# Altium PCB MAX7219_8X8LED_BOARD.PcbDoc
Units mm, origin at the board's own origin, x right, y up, seen from the top; angles counter-clockwise.
Board outline 50 x 50 mm, 2 copper layers (Top Layer, Bottom Layer), stack 1.621 mm thick; 4 components, 23 nets, 60 pads, 26 vias.
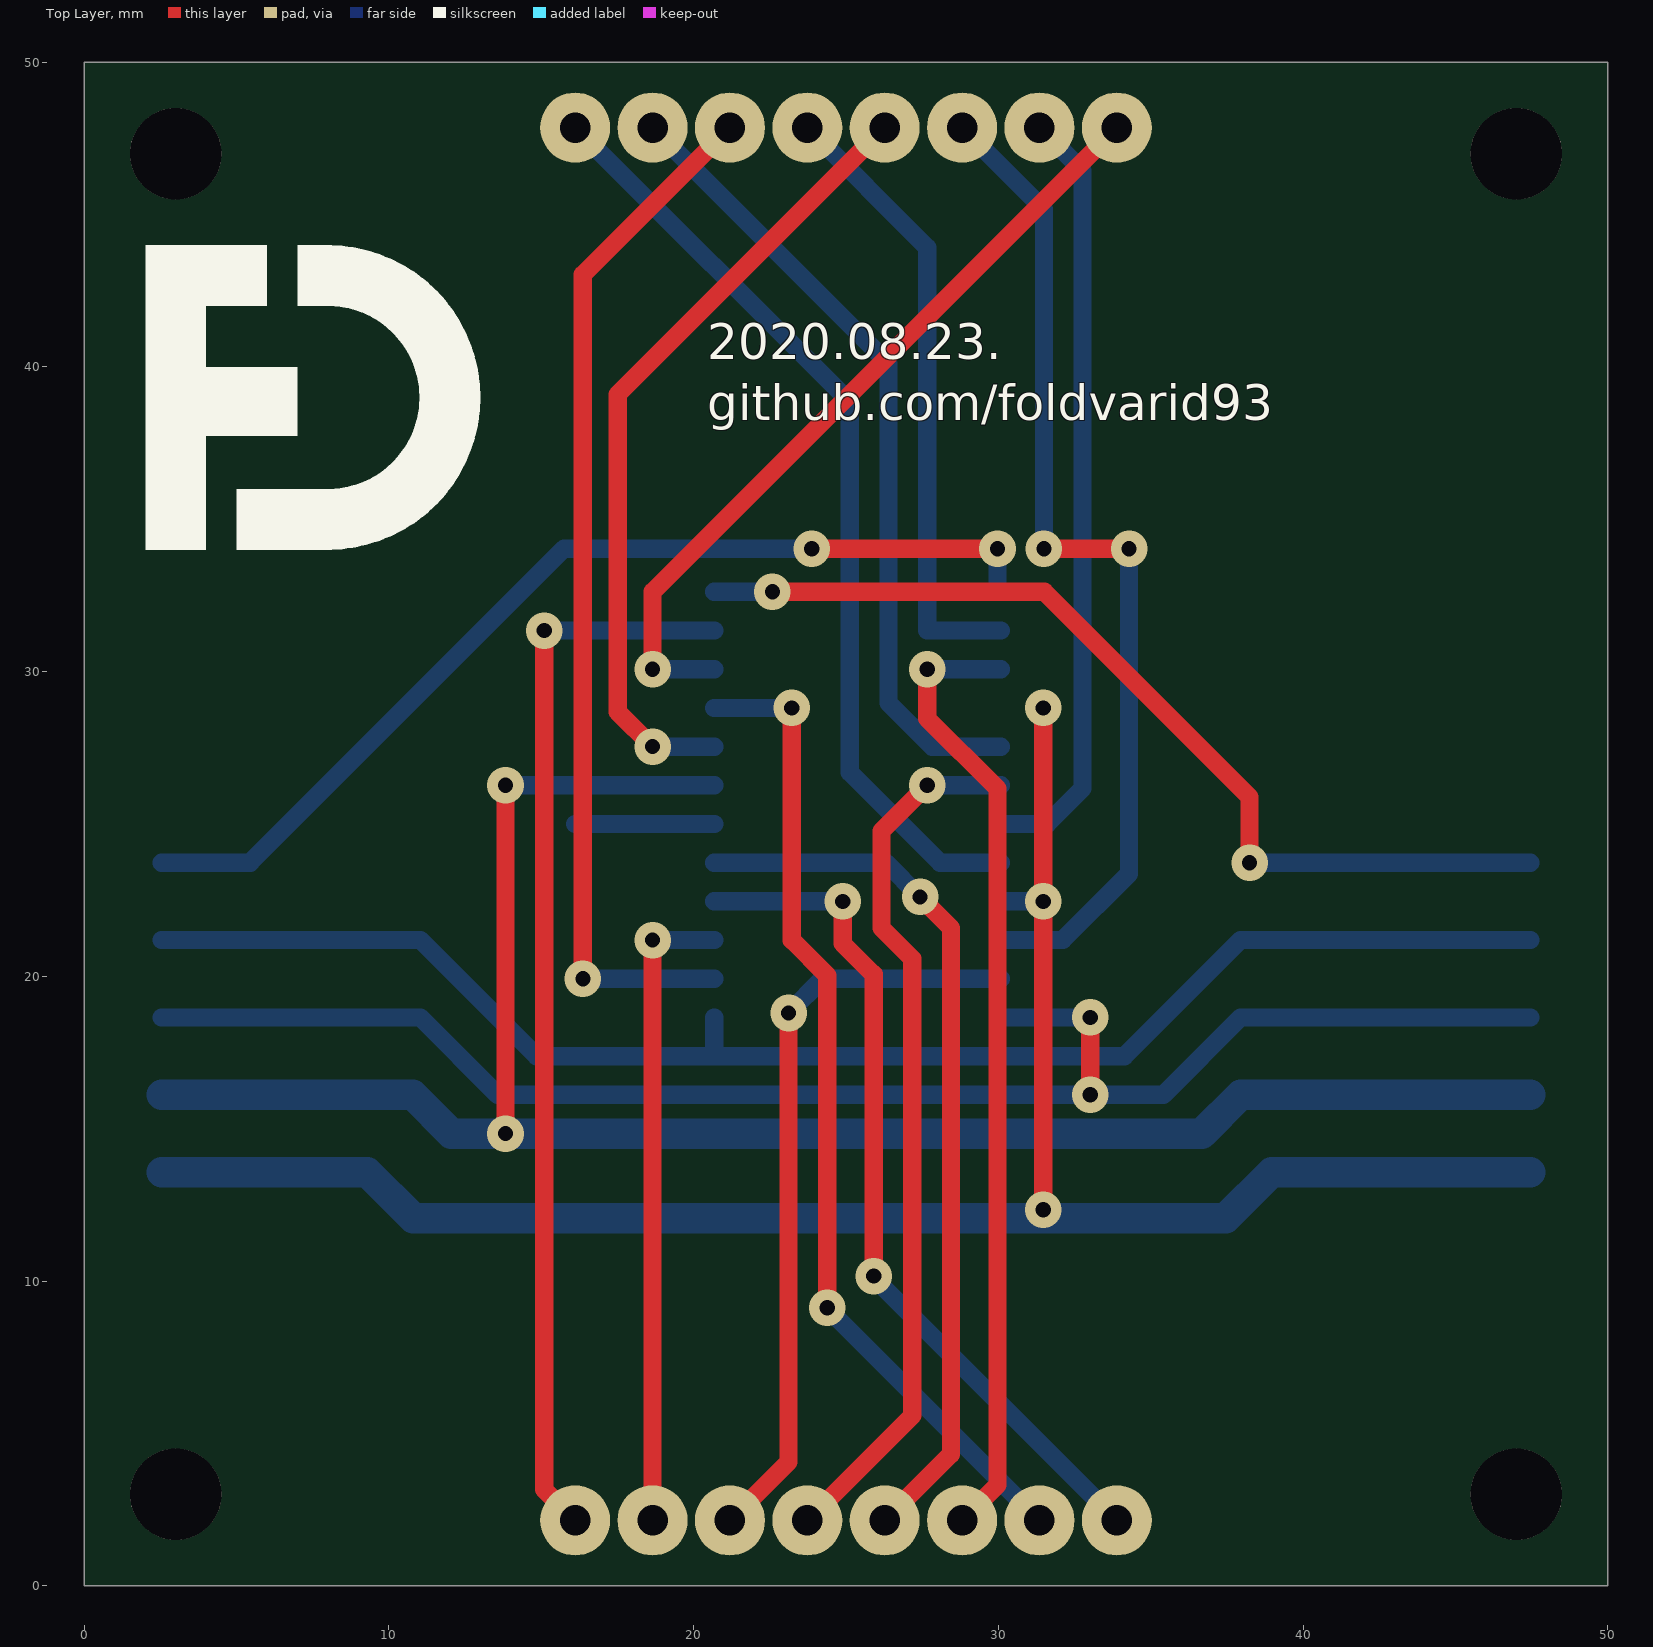
[diagram p0: Top Layer view]
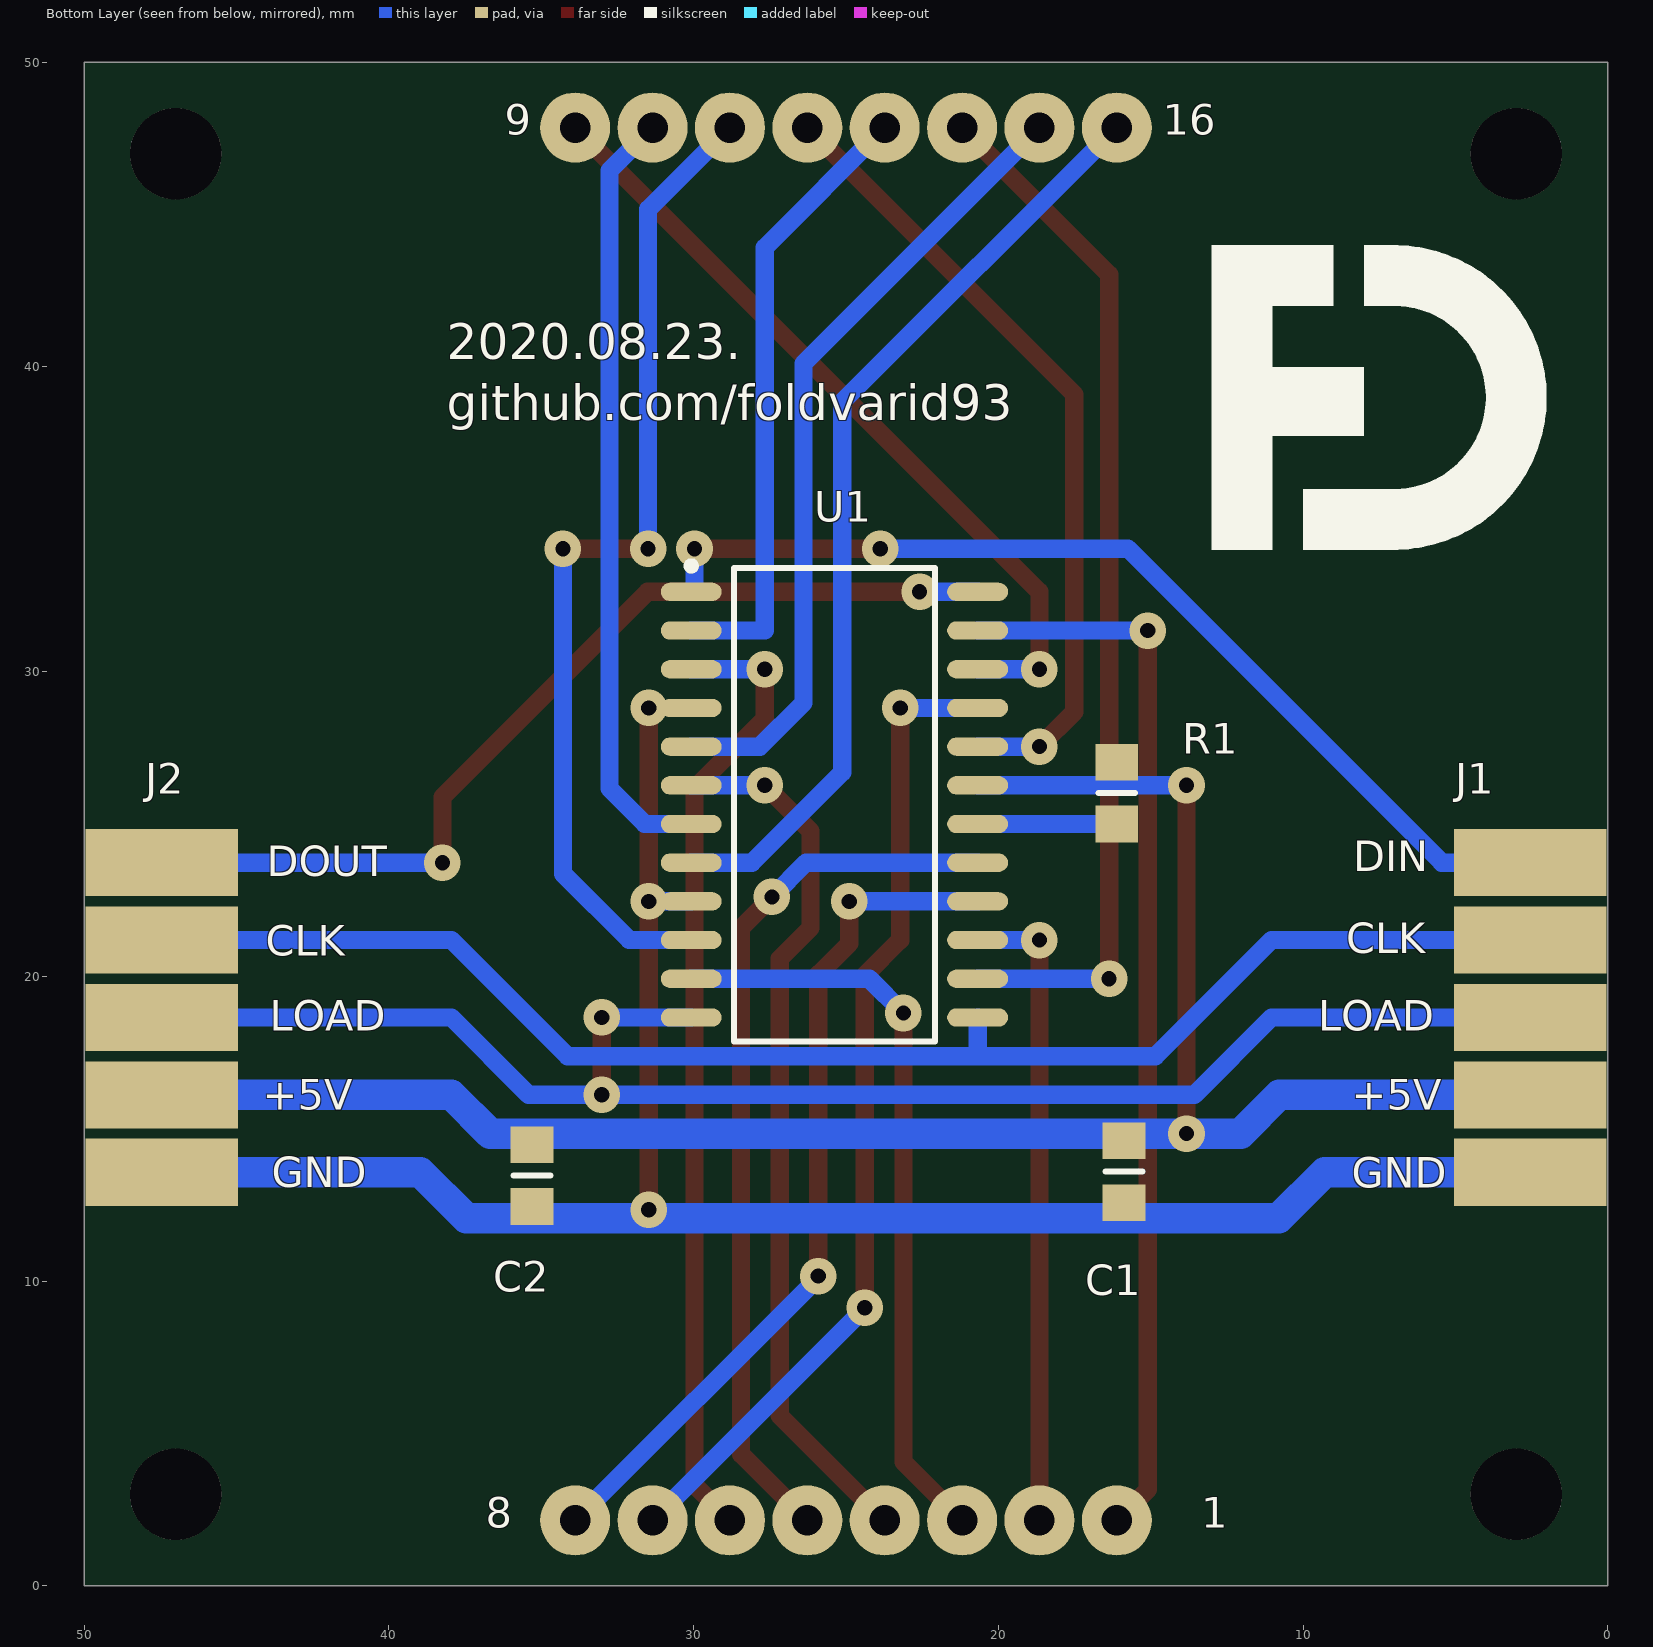
[diagram p1: Bottom Layer view, seen from below]
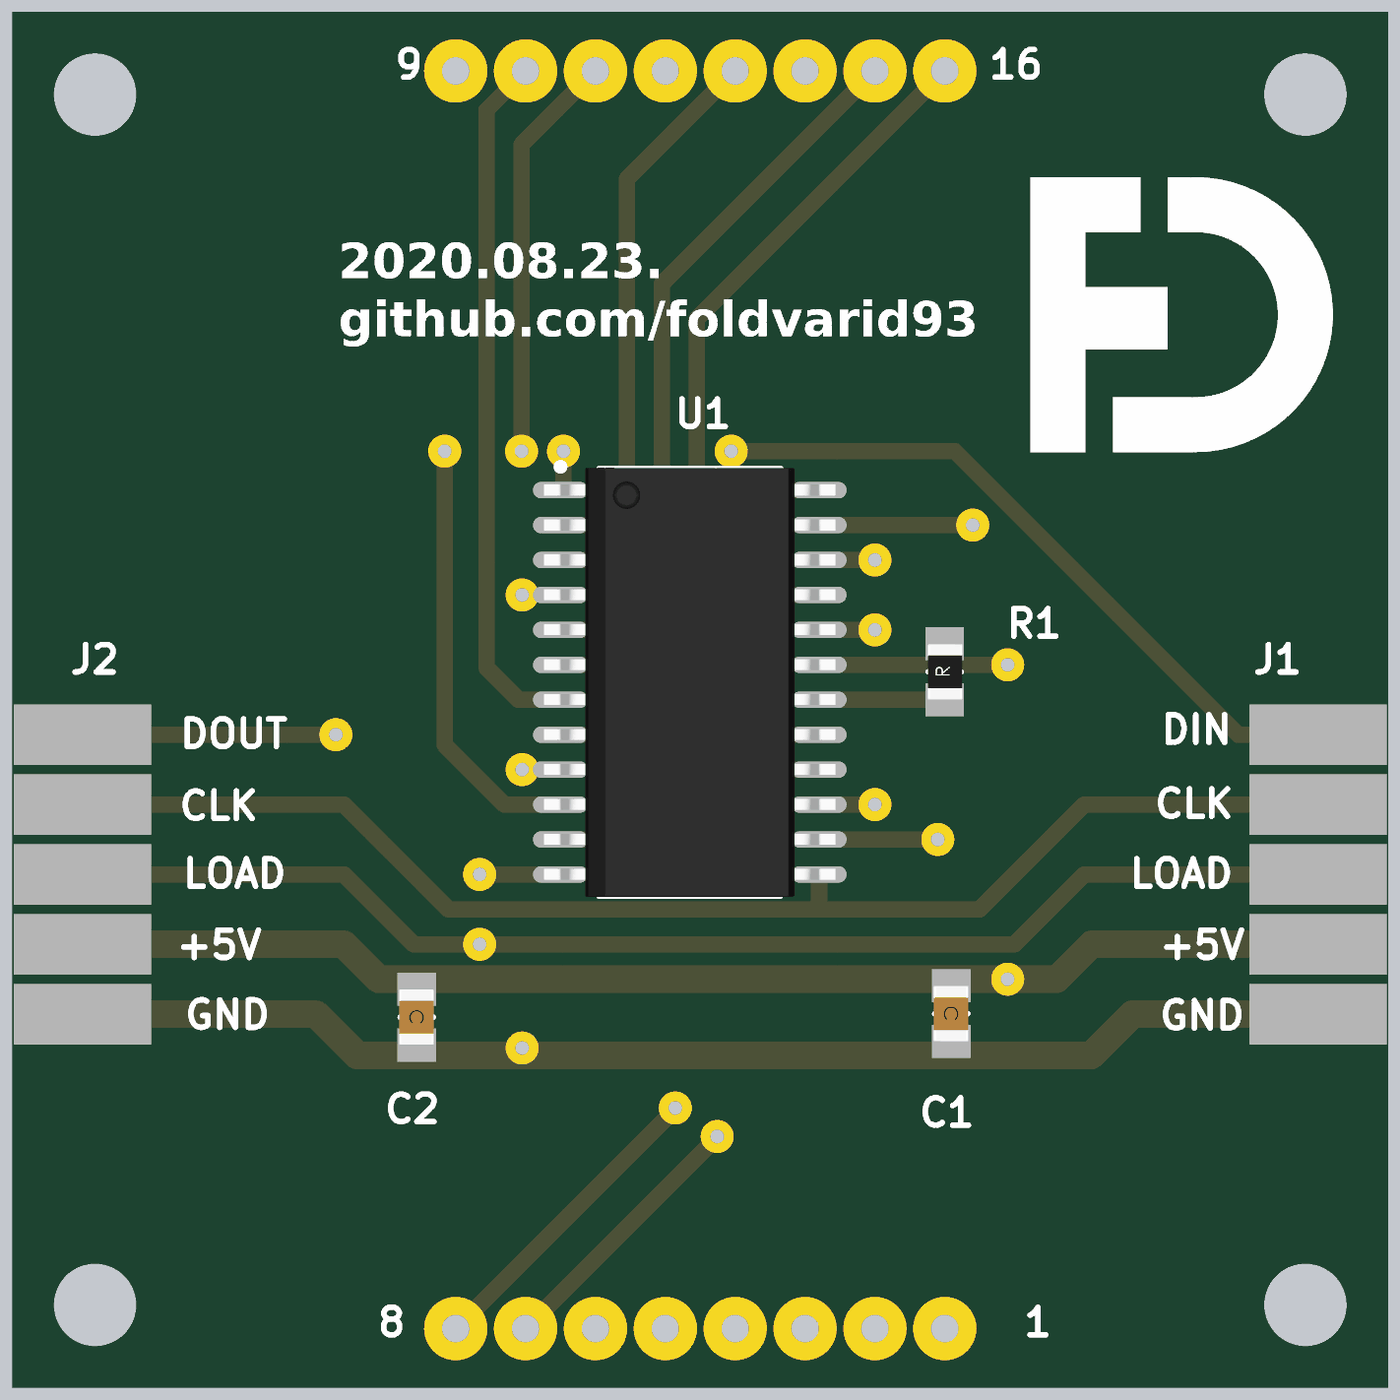
[diagram p2: 3D render of the assembled board from below, using the file's embedded part models]

## Layer stack, top to bottom
Top Solder: solder mask 0.0102, Solder Resist, Dk 3.5
Top Layer: signal copper 0.0356
Dielectric1: core 1.55, FR-4, Dk 4.8
Bottom Layer: signal copper 0.0356
Bottom Solder: solder mask 0.0102, Solder Resist, Dk 3.5

## Board outline
0,0 50,0 50,50 0,50

## Design rules (kind name [scope] priority, off if disabled: settings)
AssemblyTestPointUsage [All] p1 off:
AssemblyTestpoint [All] p1 off: testpointundercomponent=TRUE minsize=1.016 maxsize=2.54 preferedsize=1.524 minholesize=0 maxholesize=1.016 preferedholesize=0.813 testpointgrid=0.025 usegrid=TRUE gridtolerance=0 allowsidetop=TRUE allowsidebottom=TRUE
Clearance Top_GND_Polly [InPolygon and InNet('GND_12V')] p1: gap=0.25 ignorepadtopadclearanceinfootprint=FALSE except(0: Arc-Hole Track-Hole SMDPad-Hole THPad-Hole Via-Hole Fill-Hole Poly-Hole Region-Hole Text-Hole)
Clearance [All] p2: gap=0.2 ignorepadtopadclearanceinfootprint=FALSE except(0: Arc-Hole Track-Hole SMDPad-Hole THPad-Hole Via-Hole Fill-Hole Poly-Hole Region-Hole Text-Hole)
ComponentClearance [All] p1 off: gap=0.254 collisioncheckmode=3 verticalgap=0.254 showdistances=FALSE
FabricationTestPointUsage [All] p1 off: valid=0 allowmultiple=FALSE
FabricationTestpoint [All] p1 off: side=3 testpointundercomponent=TRUE minsize=1.016 maxsize=2.54 preferedsize=1.524 minholesize=0 maxholesize=1.016 preferedholesize=0.813 testpointgrid=0.025 allowsidetop=TRUE allowsidebottom=TRUE usegrid=TRUE gridtolerance=0
Height [All] p1 off: minheight=0 maxheight=25.4 prefheight=12.7
HoleSize [All] p1: absolutevalues=TRUE maxlimit=5 minlimit=0.25 maxpercent=80.000 minpercent=20.000
HoleToHoleClearance [All] p1: gap=0.25 allowstackedmicrovias=TRUE
MinimumAnnularRing PadOutsideLayers_large [IsPad AND (PadIsPlated = 'True') AND (AsMM(HoleSize) > 0.45)] p1: minimumring=0.25
MinimumAnnularRing PadOutsideLayers_small [IsPad AND (PadIsPlated = 'True') AND (AsMM(HoleSize) <= 0.45)] p2: minimumring=0.225
MinimumAnnularRing ViaOutsideLayers_large [IsVia AND (AsMM(HoleSize) > 0.45)] p3: minimumring=0.25
MinimumAnnularRing ViaOutsideLayers_small [IsVia AND (AsMM(HoleSize) <= 0.45)] p4: minimumring=0.225
MinimumSolderMaskSliver [All] p1: minsoldermaskwidth=0.25
PlaneClearance [All] p1: clearance=0.5
PlaneConnect [All] p1: planeconnectstyle=Relief reliefexpansion=0.5 reliefentries=4 reliefconductorwidth=0.25 reliefairgap=0.25
PolygonConnect [All] p1: connectstyle=Relief reliefconductorwidth=0.25 reliefentries=4 polygonreliefangle="90 Angle" airgapwidth=0.254
RoutingCorners [All] p1: cornerstyle=45-Degree minsetback=2 maxsetback=2
RoutingVias [All] p1: holewidth=0.3 width=0.75 viastyle="Through Hole" minholewidth=0.25 minwidth=0.65 maxholewidth=1 maxwidth=3
SilkToSilkClearance [All] p1: silktosilkclearance=0.15
SilkToSolderMaskClearance SilkscreenOverComponentPads [IsPad] p1: minsilkscreentomaskgap=0.2 clearancetoexposedcopper=TRUE
SolderMaskExpansion [All] p1: expansion=0
Width [All] p1: maxlimit=10 minlimit=0.15 preferedwidth=0.3
16 further rules are at their usual default settings.

## Components (designator, comment, footprint, x,y, rotation, side; value= is the part's Value field where it differs from the comment)
C1 "100n" "CAP 0805" 15.875,14.605 r270 bottom
C2 "100n" "CAP 0805" 35.306,14.478 r270 bottom
R1 "10k" "RES 0805" 16.11,25 r90 bottom
U1 "MAX7219" SO24 30.08,32.62 r180 bottom

## Footprints (in the part's own frame and the unit in brackets; to place one, negate y for a bottom-side part, rotate by r counter-clockwise, add the part's x,y. Pads: shape width x height; smd on the part's side, far side on the other; paste and mask are expansions set on the pad)
"CAP 0805" [mm] "0805 CAPACITOR"
  rect 1.2x1.4 smd: 1(0,0) 2(2.032,0)
  silkscreen extent 1.02,-0.6 1.02,0.6, body extent 0.02,-0.63 2.02,0.62, height 0.6
"RES 0805" [mm] "0805 Resistor"
  rect 1.2x1.4 smd: 1(0,0) 2(2.032,0)
  silkscreen extent 1.02,-0.6 1.02,0.6, body extent 0.02,-0.63 2.02,0.62, height 0.6
SO24 [mm]
  oval 2x0.6 smd: 1(0,0) 2(0,-1.27) 3(0,-2.54) 4(0,-3.81) 5(0,-5.08) 6(0,-6.35) 7(0,-7.62) 8(0,-8.89) 9(0,-10.16) 10(0,-11.43) 11(0,-12.7) 12(0,-13.97) 13(9.4,-13.97) 14(9.4,-12.7) 15(9.4,-11.43) 16(9.4,-10.16) 17(9.4,-8.89) 18(9.4,-7.62) 19(9.4,-6.35) 20(9.4,-5.08) 21(9.4,-3.81) 22(9.4,-2.54) 23(9.4,-1.27) 24(9.4,0)
  silkscreen extent -0.13,-14.76 8,0.97, body extent -0.6,-14.78 10,0.82, height 2.58

## Part data
C1 C2: library part CAP, "NON POLARIZED CAPACITOR"
R1: library part RES, "RESISTOR"
U1: "8X8 LED DRIVER IC"

## Free pads (board coordinates)
  rect 5x2.2 smd far side: 1(2.54,23.73) 1(47.46,13.57) 2(2.54,21.19) 2(47.46,16.11) 3(2.54,18.65) 3(47.46,18.65) 4(2.54,16.11) 4(47.46,21.19) 5(2.54,13.57) 5(47.46,23.73)
  round 2.3 hole 1: 1(16.11,2.14) 2(18.65,2.14) 3(21.19,2.14) 4(23.73,2.14) 5(26.27,2.14) 6(28.81,2.14) 7(31.35,2.14) 8(33.89,2.14) 9(33.89,47.86) 10(31.35,47.86) 11(28.81,47.86) 12(26.27,47.86) 13(23.73,47.86) 14(21.19,47.86) 15(18.65,47.86) 16(16.11,47.86)
  round 3 hole 3 unplated: ""(3,3) ""(3,47) ""(47,3) ""(47,47)

## Via types
v1: diameter 1.2, hole 0.5, Top Layer to Bottom Layer, 26 vias

## Nets (pads, with @x,y where several pads share a name; then routed paths per layer and width w, separated by ;. In a path a pad name is that pad's centre, name@x,y a point inside that pad or via, vN(x,y) a via of type N, cw(c..) or ccw(c..) an arc to the next point about the centre after c; other vN are vias at no path point)
+5V: C1.1 C2.1 pad.2@47.46,16.11 pad.4@2.54,16.11 R1.2 U1.19 | length 64.3
  Top Layer w0.6: v1(13.824,14.84) v1(13.824,26.27)
  Bottom Layer w0.6: v1(13.824,26.27) U1.19
  Bottom Layer w1: pad.4@2.54,16.11 10.776,16.11 12.046,14.84 36.684,14.84 37.954,16.11 pad.2@47.46,16.11
GND: C1.2 C2.2 pad.1@47.46,13.57 pad.5@2.54,13.57 U1.4 U1.9 | length 64
  Top Layer w0.6: v1(31.475,12.34) v1(31.475,22.46) v1(31.475,28.81)
  Bottom Layer w0.6: U1.9 v1(31.475,22.46)
  Bottom Layer w1: pad.5@2.54,13.57 9.29,13.57 10.795,12.065 37.465,12.065 38.97,13.57 pad.1@47.46,13.57
NetDISP1_1: pad.1@16.11,2.14 U1.23 | length 35.2
  Top Layer w0.6: v1(15.094,31.35) 15.094,3.156 pad.1@16.11,2.14
  Bottom Layer w0.6: v1(15.094,31.35) U1.23
NetDISP1_2: pad.2@18.65,2.14 U1.15 | length 21.1
  Top Layer w0.6: pad.2@18.65,2.14 v1(18.65,21.19)
  Bottom Layer w0.6: v1(18.65,21.19) U1.15
NetDISP1_3: pad.3@21.19,2.14 U1.11 | length 25.1
  Top Layer w0.6: pad.3@21.19,2.14 23.114,4.064 v1(23.114,18.796)
  Bottom Layer w0.6: pad.3@21.025,2.305 pad.3@21.19,2.14 ; v1(23.114,18.796) 24.238,19.92 U1.11
NetDISP1_4: pad.4@23.73,2.14 U1.6 | length 29
  Top Layer w0.6: pad.4@23.73,2.14 27.178,5.588 27.178,20.574 26.162,21.59 26.162,24.767 v1(27.665,26.27)
  Bottom Layer w0.6: v1(27.665,26.27) U1.6
NetDISP1_5: pad.5@26.27,2.14 U1.17 | length 29
  Top Layer w0.6: pad.5@26.27,2.14 28.448,4.318 28.448,21.59 v1(27.432,22.606)
  Bottom Layer w0.6: U1.17 26.308,23.73 v1(27.432,22.606)
NetDISP1_6: pad.6 U1.3 | length 31.8
  Top Layer w0.6: v1(27.665,30.08) 27.665,28.469 29.972,26.162 29.972,3.302 pad.6
  Bottom Layer w0.6: v1(27.665,30.08) U1.3
NetDISP1_7: pad.7 U1.21 | length 32.6
  Top Layer w0.6: v1(23.222,28.81) 23.222,21.188 24.384,20.026 v1(24.384,9.125)
  Bottom Layer w0.6: U1.21 v1(23.222,28.81) ; v1(24.384,9.125) 24.365,9.125 pad.7
NetDISP1_8: pad.8 U1.16 | length 28.2
  Top Layer w0.6: v1(24.892,22.46) 24.892,21.082 25.908,20.066 v1(25.908,10.16)
  Bottom Layer w0.6: U1.16 v1(24.892,22.46) ; v1@25.908,10.122 pad.8
NetDISP1_9: pad.9 U1.22 | length 26.3
  Top Layer w0.6: v1(18.65,30.08) 18.65,32.62 pad.9 pad.9@33.683,47.86
  Bottom Layer w0.6: v1(18.65,30.08) U1.22
NetDISP1_10: pad.10 U1.7 | length 25.5
  Bottom Layer w0.6: U1.7 31.604,25 32.766,26.162 32.766,46.444 pad.10
NetDISP1_11: pad.11 U1.10 | length 33.5
  Top Layer w0.6: v1(31.496,34.036) v1(34.29,34.036)
  Bottom Layer w0.6: pad.11 31.496,45.174 v1(31.496,34.036) ; U1.10 32.112,21.19 34.29,23.368 v1(34.29,34.036)
NetDISP1_12: pad.12 U1.20 | length 26.5
  Top Layer w0.6: v1(18.65,27.54) 17.505,28.685 17.505,39.095 pad.12
  Bottom Layer w0.6: v1(18.65,27.54) U1.20
NetDISP1_13: pad.13 U1.2 | length 20.6
  Bottom Layer w0.6: pad.13 27.665,43.925 27.665,31.35 U1.2
NetDISP1_14: pad.14 U1.14 | length 34.3
  Top Layer w0.6: v1(16.364,19.92) 16.364,43.034 pad.14
  Bottom Layer w0.6: v1(16.364,19.92) U1.14
NetDISP1_15: pad.15 U1.5 | length 26.4
  Bottom Layer w0.6: pad.15 26.395,40.115 26.395,28.977 27.832,27.54 U1.5
NetDISP1_16: pad.16 U1.8 | length 31.1
  Bottom Layer w0.6: pad.16 25.125,38.845 25.125,26.691 28.086,23.73 U1.8
NetJ1_1: pad.1@2.54,23.73 U1.1 | length 33
  Top Layer w0.6: v1(23.876,34.036) v1(29.972,34.036)
  Bottom Layer w0.6: pad.1@2.54,23.73 5.442,23.73 15.748,34.036 v1(23.876,34.036) ; U1.1@29.972,32.728 v1(29.972,34.036)
NetJ1_2: pad.2@2.54,21.19 pad.4@47.46,21.19 U1.13 | length 49.3
  Bottom Layer w0.6: pad.2@2.54,21.19 11.03,21.19 14.84,17.38 20.68,17.38 ; U1.13 20.68,17.38 ; pad.4@47.46,21.19 37.954,21.19 34.144,17.38 20.68,17.38
NetJ1_3: pad.3@2.54,18.65 pad.3@47.46,18.65 U1.12 | length 52.5
  Top Layer w0.6: v1(33.02,16.11) v1(33.02,18.65)
  Bottom Layer w0.6: pad.3@2.54,18.65 11.03,18.65 13.57,16.11 v1(33.02,16.11) 35.414,16.11 37.954,18.65 pad.3@47.46,18.65 ; U1.12 v1(33.02,18.65)
NetJ2_5: pad.5@47.46,23.73 U1.24 | length 31.7
  Top Layer w0.6: v1(22.585,32.62) 31.515,32.62 38.246,25.889 v1(38.246,23.73)
  Bottom Layer w0.6: U1.24 v1(22.585,32.62) ; v1(38.246,23.73) pad.5@47.46,23.73
NetR1_1: R1.1 U1.18 | length 4.6
  Bottom Layer w0.6: R1.1 U1.18

## Silkscreen, mask and mechanical layers (free items; w line width, h text height)
Top Overlay:
  rectangle: 5,34 8,36
  rectangle: 7,42 8,44
  rectangle: 2.555,37.73 7,40
  rectangle: 3,42 6,44
  rectangle: 2,34 4,44
  lines w2: 8,35 ccw(c8,39) 8,43
  text "2020.08.23. / github.com/foldvarid93" at 20.453,37.857 h2
Bottom Overlay:
  region: 10,36 7,36 7,34 10,34
  region: 8,44 7,44 7,42 8,42
  region: 12.445,40 8,40 8,37.73 12.445,37.73
  region: 12,44 9,44 9,42 12,42
  region: 13,44 11,44 11,34 13,34
  lines w2: 7,35 cw(c7,39) 7,43
  text "16" at 14.605,47.625 h1
  text "9" at 36.195,47.625 h1
  text "2020.08.23. / github.com/foldvarid93" at 38.106,37.857 h2
  text "J1" at 5,26 h1
  text "J2" at 48,26 h1
  text "DIN" at 8.357,23.444 h1
  text "DOUT" at 44.018,23.292 h1
  text "CLK" at 8.585,20.752 h1
  text "CLK" at 44.044,20.676 h1
  text "LOAD" at 9.5,18.212 h1
  text "LOAD" at 43.917,18.212 h1
  text "+5V" at 8.407,15.621 h1
  text "+5V" at 44.145,15.621 h1
  text "GND" at 43.84,13.081 h1
  text "GND" at 8.407,13.056 h1
  text "1" at 13.335,1.905 h1
  text "8" at 36.83,1.905 h1
Mechanical 2:
  the board outline again, w0.2